# Altium PCB Main Board.PcbDoc
Units mil, origin at the board's own origin, x right, y up, seen from the top; angles counter-clockwise.
Board outline 3554 x 3676 mil, 4 copper layers (Top Layer, Master Layer, Slave Layer, Bottom Layer), stack 23.756 mil thick; 52 components, 46 nets, 312 pads, 87 vias.
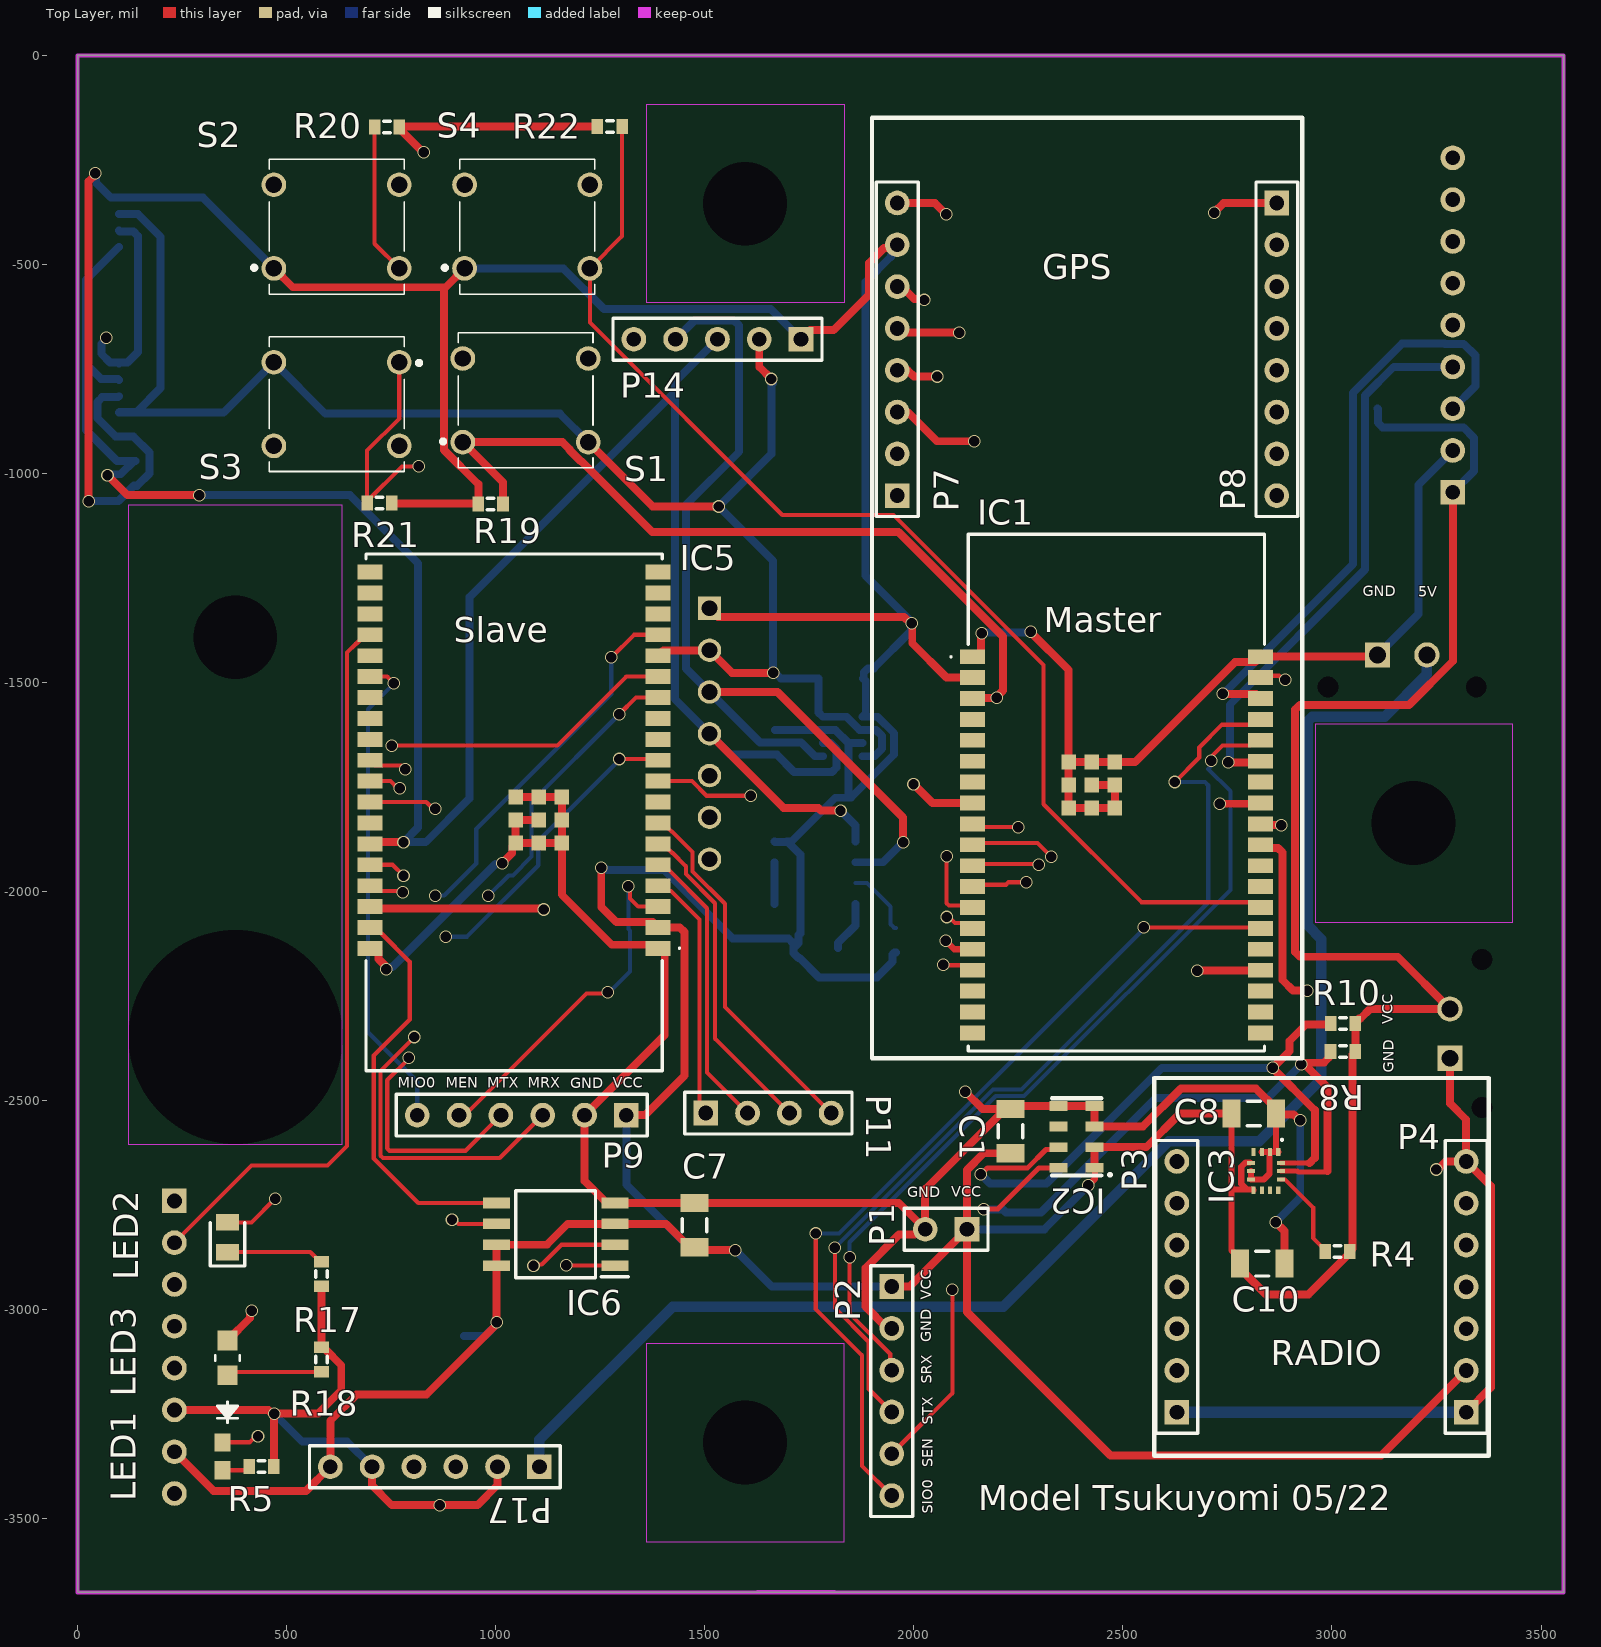
[diagram p0: Top Layer view]
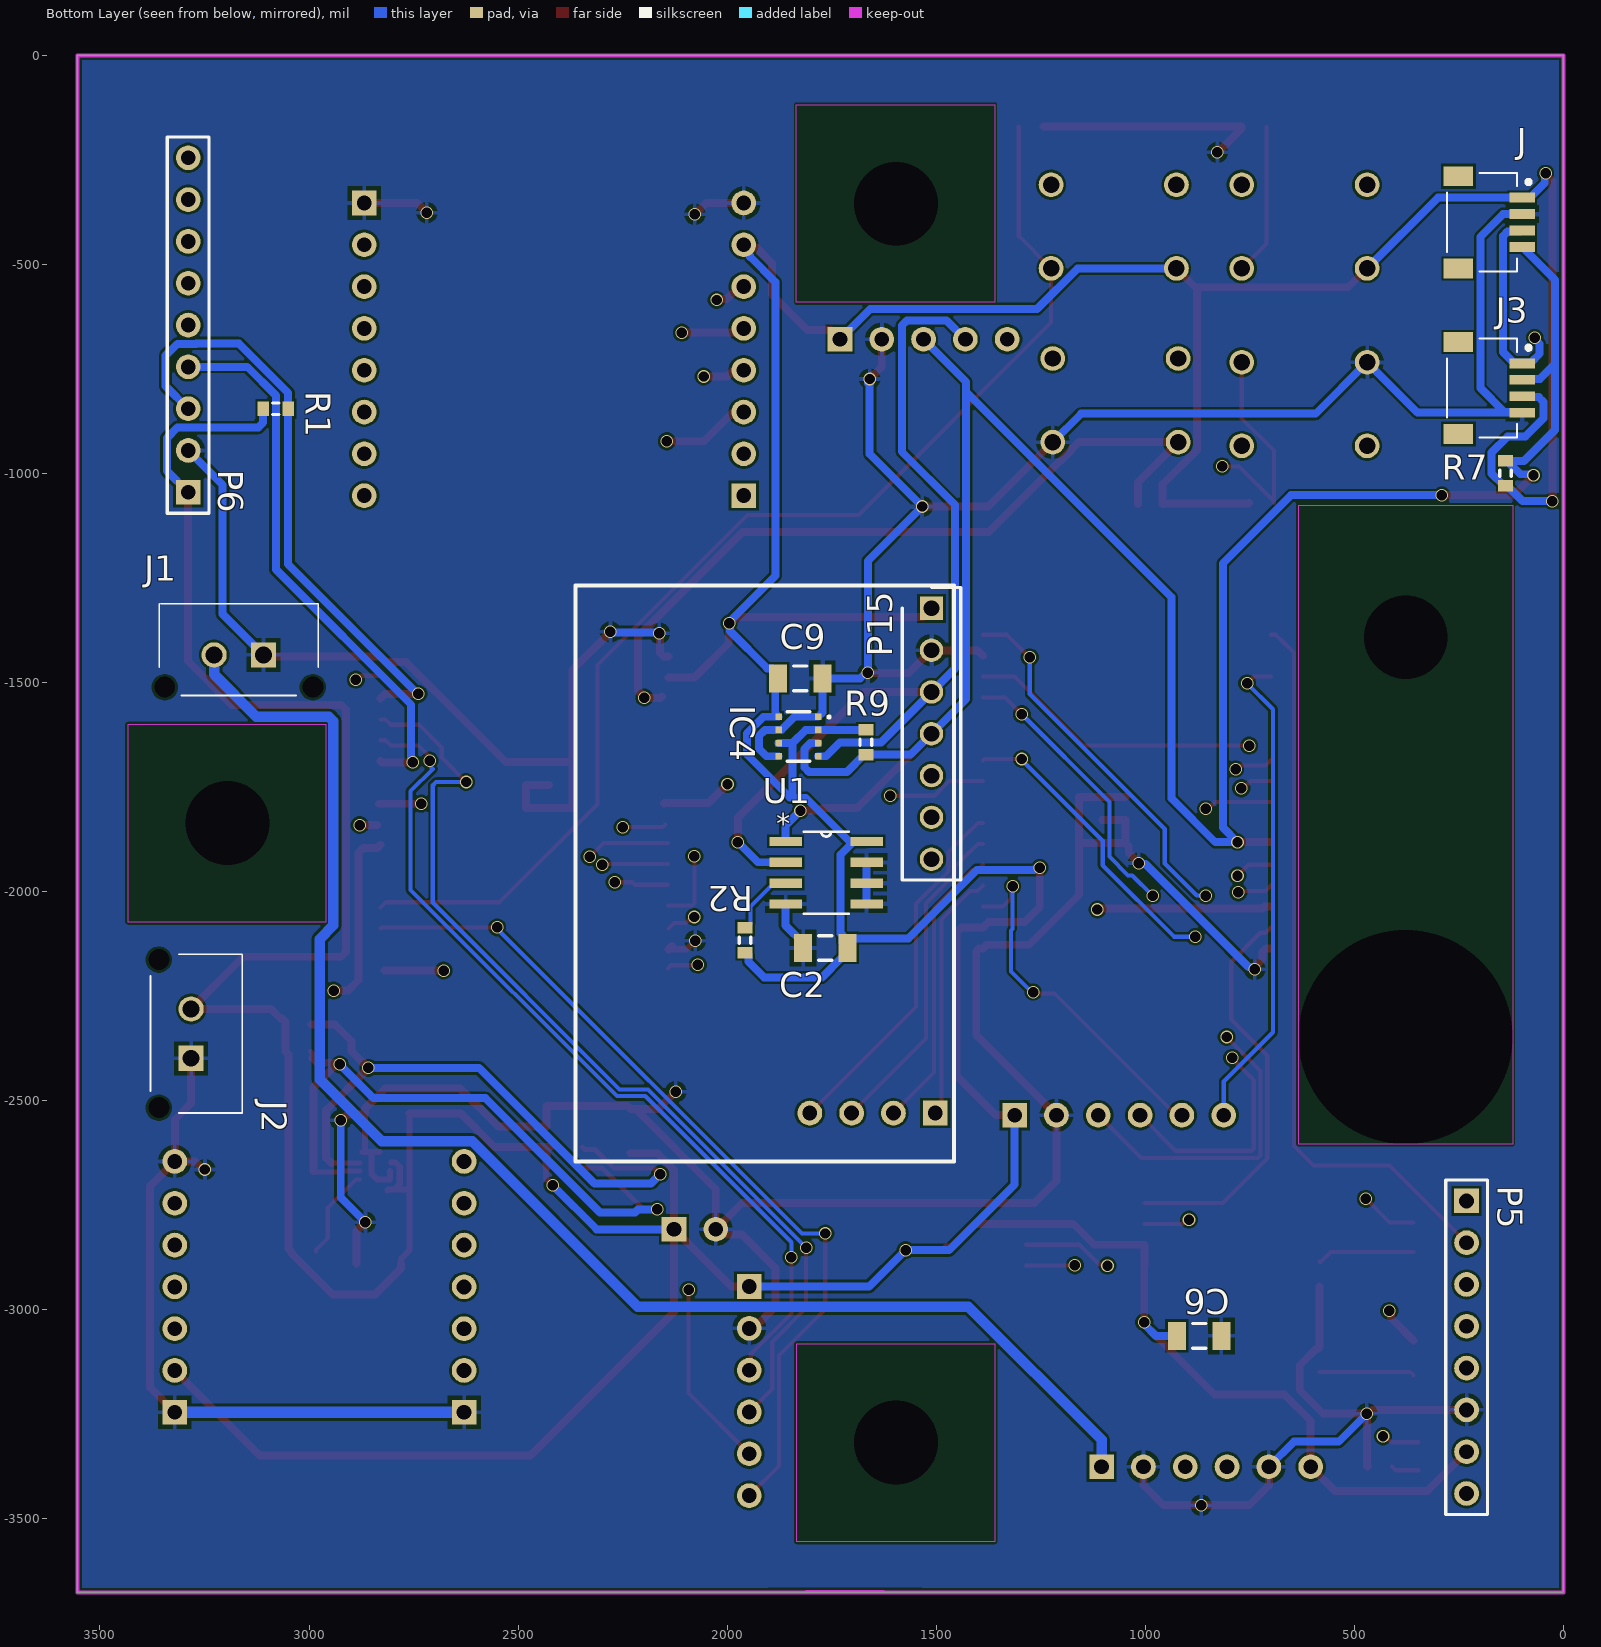
[diagram p1: Bottom Layer view, seen from below]
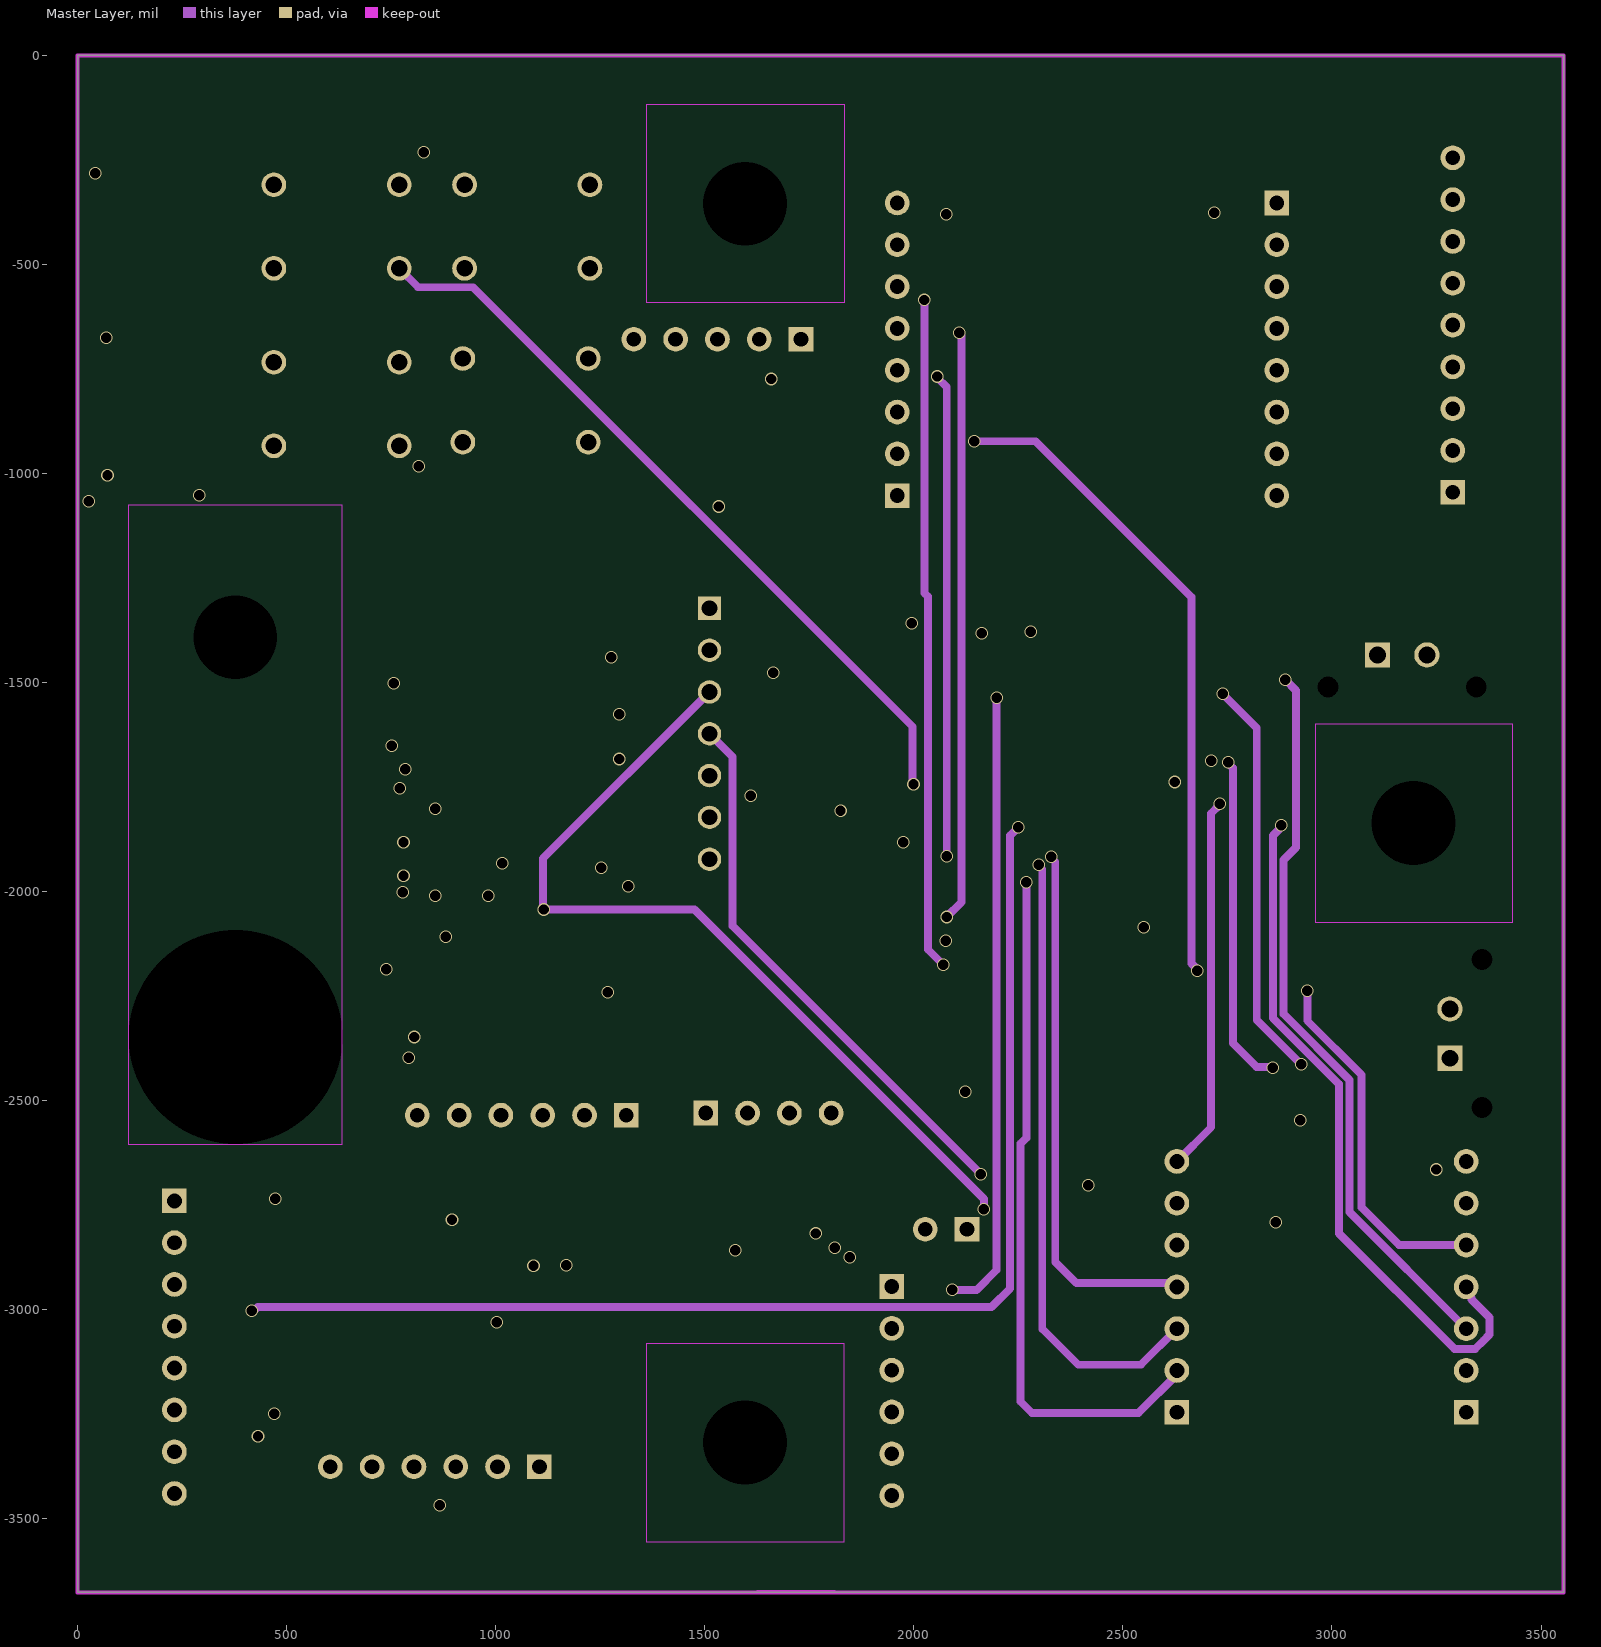
[diagram p2: Master Layer]
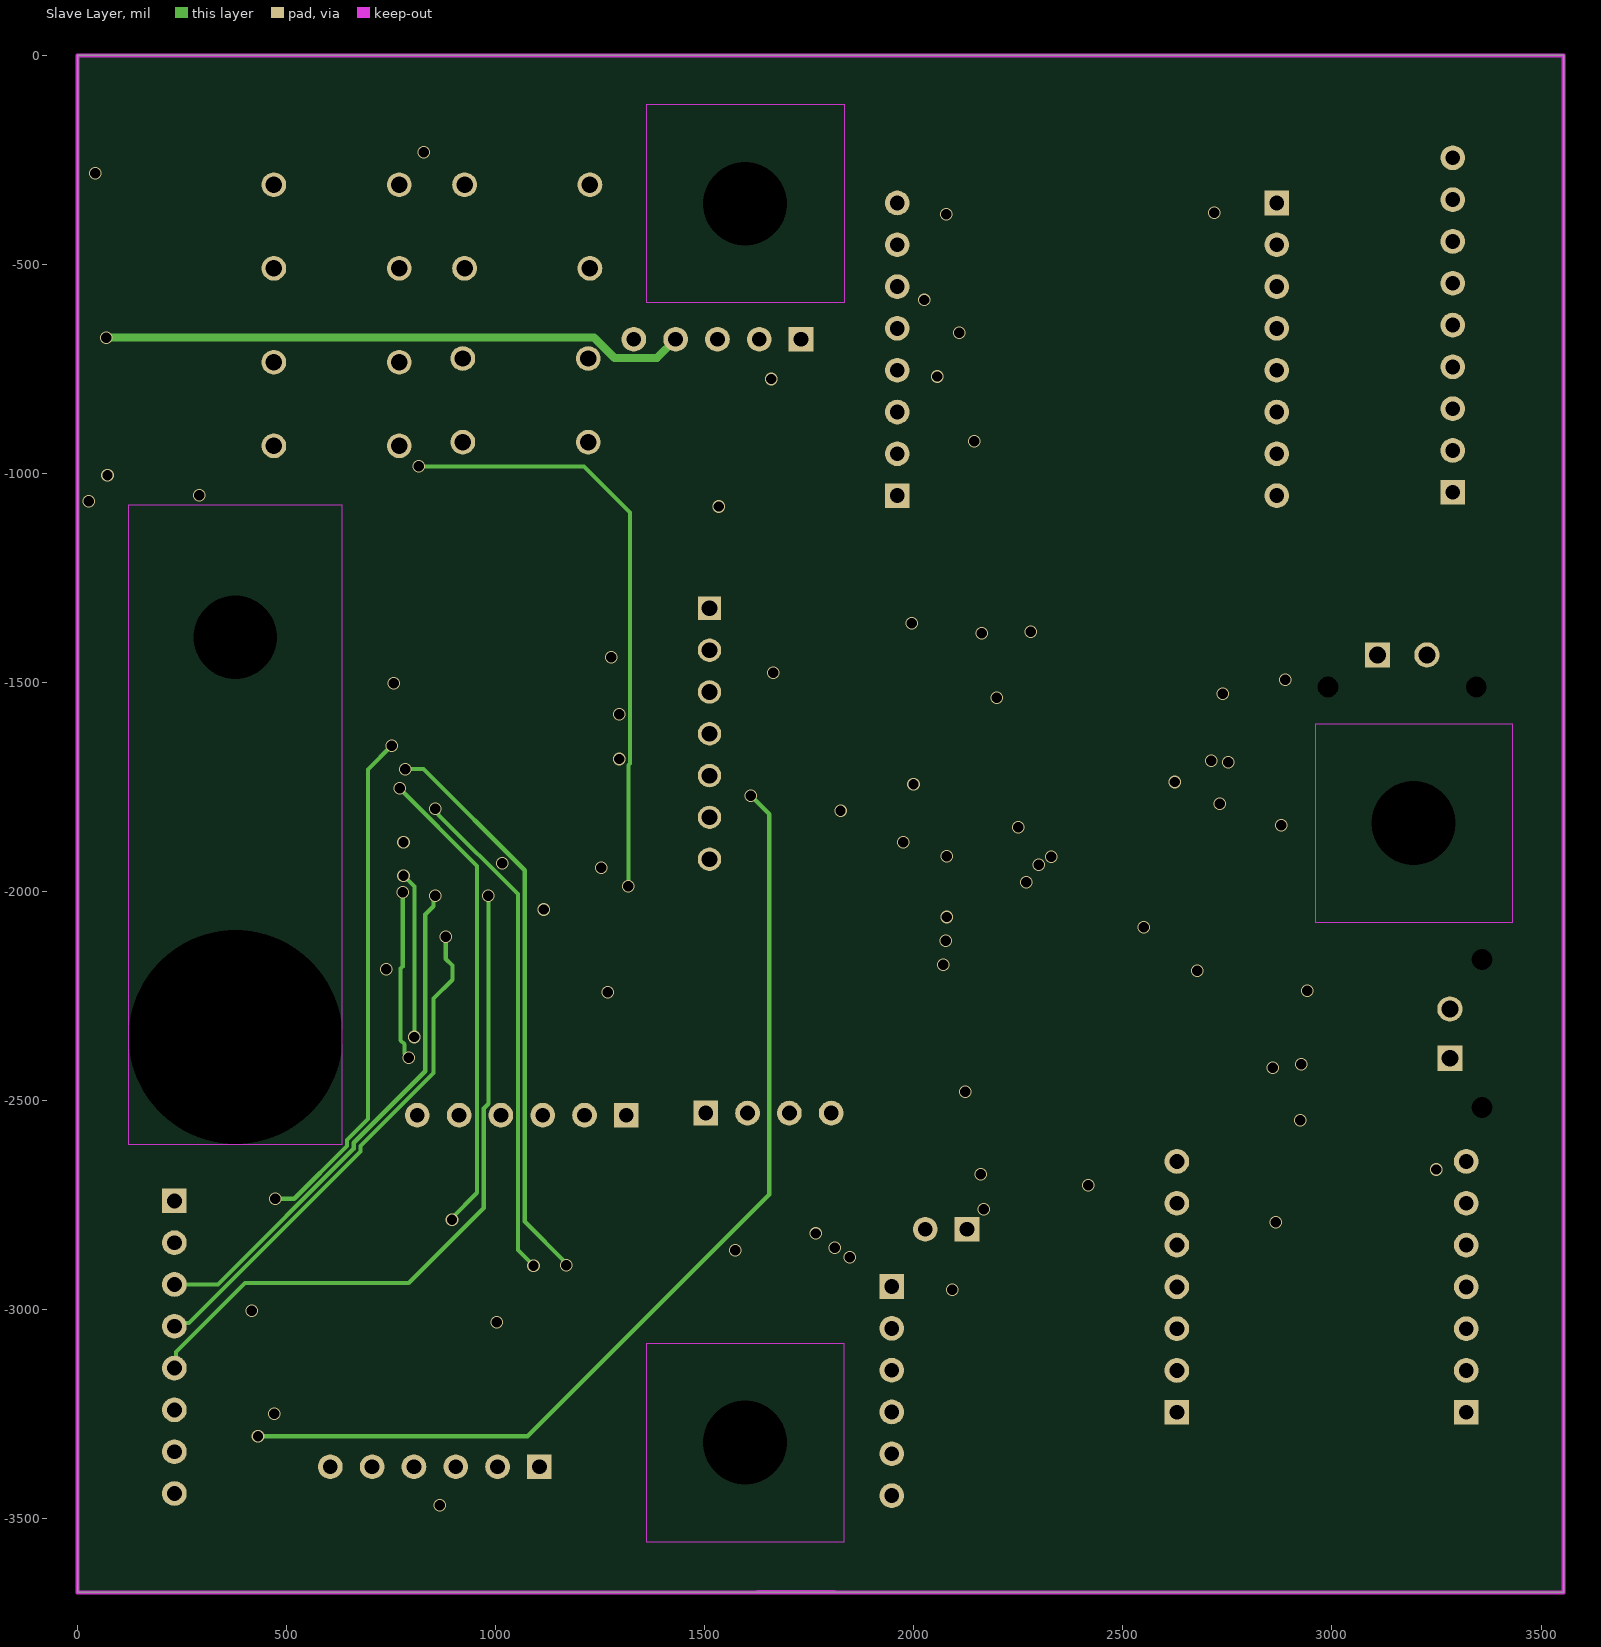
[diagram p3: Slave Layer]

## Layer stack, top to bottom
Top Solder: solder mask 0.4, Solder Resist, Dk 3.5
Top Layer: signal copper 1.4
Dielectric 2: prepreg 2.8, PP-006, Dk 4.1
Master Layer: signal copper 1.378
Dielectric 1: dielectric 12.6, FR-4, Dk 4.8
Slave Layer: signal copper 1.378
Dielectric 3: prepreg 2.8, PP-006, Dk 4.1
Bottom Layer: signal copper 1.4
Bottom Solder: solder mask 0.4, Solder Resist, Dk 3.5

## Board outline
0,0 3554,0 3554,-3676 0,-3676

## Design rules (kind name [scope] priority, off if disabled: settings)
Clearance [All] p1: gap=6 ignorepadtopadclearanceinfootprint=TRUE
DiffPairsRouting [All] p1: maxlimit=25 minlimit=10 mostfreqgap=25 toplayer_minwidth=15 toplayer_maxwidth=15 toplayer_prefwidth=15 midlayer1_minwidth=15 midlayer1_maxwidth=15 midlayer1_prefwidth=15 midlayer2_minwidth=15 midlayer2_maxwidth=15 midlayer2_prefwidth=15 bottomlayer_minwidth=15 bottomlayer_maxwidth=15 bottomlayer_prefwidth=15 maxuncoupledlength=500
HoleSize [All] p1: absolutevalues=TRUE maxlimit=520 minlimit=1 maxpercent=80.000 minpercent=20.000
MinimumSolderMaskSliver [All] p1: minsoldermaskwidth=1
PolygonConnect [All] p1: connectstyle=Relief reliefconductorwidth=10 reliefentries=4 polygonreliefangle="90 Angle" airgapwidth=10
RoutingTopology RoutingTopology_1 [All] p1: topology=Shortest
RoutingTopology [All] p2: topology=Shortest
RoutingVias [All] p1: holewidth=16 width=30 viastyle="Through Hole" minholewidth=25 minwidth=25 maxholewidth=110 maxwidth=250
SilkToSilkClearance [All] p1: silktosilkclearance=5
SilkToSolderMaskClearance [IsText] p1: minsilkscreentomaskgap=5 clearancetoexposedcopper=TRUE
SolderMaskExpansion [All] p1: expansion=4 istentingtop=FALSE
UnRoutedNet [All] p1: checkbadconnections=TRUE
Width [All] p1: maxlimit=28 minlimit=10 preferedwidth=10 toplayer_prefwidth=15 minimp=50.000000 maximp=50.000000 favimp=50.000000
23 further rules are at their usual default settings.

## Components (designator, comment, footprint, x,y, rotation, side; value= is the part's Value field where it differs from the comment)
C1 "Cap Semi" C1206 2231,-2573 r270 top value=100nF
C2 "Cap Semi" C1206 1764.85,-2135 r180 bottom value=0.01uF
C6 "Cap Semi" C1206 870.85,-3063 r0 bottom value=100nF
C7 "Cap Semi" C1206 1475,-2797.85 r270 top value=100nF
C8 "Cap Semi" C1206 2812.85,-2531 r180 top value=100nF
C9 "Cap Semi" C1206 1825,-1490 r0 bottom value=100nF
C10 "Cap Semi" C1206 2833,-2890 r180 top value=100nF
IC1 "ESP32-WROVER-E-N16R8" ESP32WROVEREN16R8 2484.39,-1763.4 r0 top
IC2 "MS561101BA03-50" MS561101BA03-50 2389,-2587 r180 top
IC3 "ISM330DHCXTR" LGA-14(2.5X3X0.86) 2842,-2669 r270 top
IC4 "BME680" BME680 1829.24,-1629.24 r0 bottom
IC5 "ESP32-WROVER-E-N16R8" ESP32WROVEREN16R8 1043.49,-1810.8 r180 top
IC6 "W25Q128JVSIM_TR" SOIC127P790X216-8N 1143,-2820 r180 top
J "SM04B-SRSS-TB(LF)(SN)" JST_SM04B-SRSS-TB(LF)(SN) 98,-399.24 r270 bottom
J1 "0436500217" 0436500217 3108.89,-1434 r180 bottom
J2 "0436500217" 0436500217 3282,-2399 r270 bottom
J3 "SM04B-SRSS-TB(LF)(SN)" JST_SM04B-SRSS-TB(LF)(SN) 98,-795.62 r270 bottom
LED1 "LTST-C193TBKT-5A" 0603 346,-3351 r90 top
LED2 "LTST-C170EKT" LEDC2012X120N 358,-2827 r90 top
LED3 "LTST-C170GKT" LED_LTST-C170GKT_LTO 358,-3115.5 r90 top
P1 "Header 2" HDR1X2 2127,-2808 r180 top
P2 "Header 6" HDR1X6 1947,-2945 r270 top
P3 "Header 7" HDR1X7 2629,-3245.7 r90 top
P4 "Header 7" HDR1X7 3321,-3245.7 r90 top
P5 "Header 8" HDR1X8 231,-2740 r270 bottom
P6 "Header 9" HDR1X9 3289,-1045 r90 bottom
P7 "Header 8" HDR1X8 1960,-1053 r90 top
P8 "Header 8" HDR1X8 2868,-353 r270 top
P9 "Header 6" HDR1X6 1312,-2535 r180 top
P11 "Header 4" HDR1X4 1502,-2530 r0 top
P14 "Header 5" HDR1X5 1730,-679 r180 top
P15 "Header 7" RHDR7W76P0X254_1X7_1778X356X864P 1511,-1322.67 r270 bottom
P17 "Header 6" HDR1X6 1104,-3376 r180 top
R1 "Res3" J1-0603 3079.53,-845 r0 bottom value=10K
R2 "Res3" J1-0603 1957,-2116.47 r90 bottom value=10K
R4 "Res3" J1-0603 3013,-2861 r180 top value=10K
R5 "Res3" J1-0603 439,-3375.46 r0 top value="30 Ohm"
R7 "Res3" J1-0603 138,-999.53 r270 bottom value=10K
R8 "Res3" J1-0603 3026,-2383 r0 top value=10K
R9 "Res3" J1-0603 1668,-1643 r270 bottom value=4.7K
R10 "Res3" J1-0603 3026.47,-2316 r0 top value=10K
R17 "Res3" J1-0603 583,-2914.96 r270 top value="30 Ohm"
R18 "Res3" J1-0603 583,-3119.47 r90 top value="30 Ohm"
R19 "Res3" J1-0603 987.47,-1073 r0 top value=10K
R20 "Res3" J1-0603 739.47,-171 r180 top value=10K
R21 "Res3" J1-0603 721.47,-1070.39 r180 top value=10K
R22 "Res3" J1-0603 1272.53,-170 r0 top value=10K
S1 "KSA0M411LFTR" KSA0M411LFTR 921,-923.43 r0 top
S2 "KSA0M411LFTR" KSA0M411LFTR 469,-507.9 r0 top
S3 "KSA0M411LFTR" KSA0M411LFTR 769,-735.57 r180 top
S4 "KSA0M411LFTR" KSA0M411LFTR 925,-507.9 r0 top
U1 "TMP175AIDR" D8 1763,-1955 r180 bottom

## Footprints (in the part's own frame and the unit in brackets; to place one, negate y for a bottom-side part, rotate by r counter-clockwise, add the part's x,y. Pads: shape width x height; smd on the part's side, far side on the other; paste and mask are expansions set on the pad)
0603 [mm]
  rect 1.1x1 smd: 1(-0.85,0) 2(0.85,0)
0436500217 [mm]
  rect 1.53x1.53 hole 1.02: 1(0,0)
  round 1.53 hole 1.02: 2(-3,0)
  round 0.635 hole 1.27 unplated: MH1(3,-1.96) MH2(-6,-1.96)
  silkscreen extent -6.32,-2.47 3.32,3.1, body extent -6.53,-2.49 3.53,3.1, height 10
BME680 [mm]
  rect 0.4x0.4 smd: 1(-1.2,-1.2) 2(-1.2,-0.4) 3(-1.2,0.4) 4(-1.2,1.2) 5(1.2,1.2) 6(1.2,0.4) 7(1.2,-0.4) 8(1.2,-1.2)
  silkscreen extent -1.89,-1.5 0.7,1.5
C1206 [mm] "Chip Capacitor, Body 3.2x1.6mm, IPC High Density"
  rect 1.1x1.7 smd: 1(-1.35,0) 2(1.35,0)
  silkscreen extent -0.4,-0.75 0.4,0.75, body extent -1.7,-0.9 1.7,0.9, height 1.3
D8 [mil]
  rect 78x22 smd: 1(-97,75) 2(-97,25) 3(-97,-25) 4(-97,-75) 5(97,-75) 6(97,-25) 7(97,25) 8(97,75)
  silkscreen extent -54,-98 54,98, body extent -122,-99 122,99, height 69
ESP32WROVEREN16R8 [mm]
  rect 1.5x0.9 smd: 1(-8.75,8.26) 2(-8.75,6.99) 3(-8.75,5.72) 4(-8.75,4.45) 5(-8.75,3.18) 6(-8.75,1.91) 7(-8.75,0.64) 8(-8.75,-0.63) 9(-8.75,-1.9) 10(-8.75,-3.17) 11(-8.75,-4.44) 12(-8.75,-5.71) 13(-8.75,-6.98) 14(-8.75,-8.25) 15(-8.75,-9.52) 16(-8.75,-10.79) 17(-8.75,-12.06) 18(-8.75,-13.33) 19(-8.75,-14.6) 20(8.75,-14.6) 21(8.75,-13.33) 22(8.75,-12.06) 23(8.75,-10.79) 24(8.75,-9.52) 25(8.75,-8.25) 26(8.75,-6.98) 27(8.75,-5.71) 28(8.75,-4.44) 29(8.75,-3.17) 30(8.75,-1.9) 31(8.75,-0.63) 32(8.75,0.64) 33(8.75,1.91) 34(8.75,3.18) 35(8.75,4.45) 36(8.75,5.72) 37(8.75,6.99) 38(8.75,8.26)
  rect 0.9x0.9 smd: 39(-1.5,0.46) 40(-2.9,-0.94) 41(-1.5,-0.94) 42(-0.1,-0.94) 43(-0.1,0.46) 44(-0.1,1.86) 45(-1.5,1.86) 46(-2.9,1.86) 47(-2.9,0.46)
  silkscreen extent -10.1,-15.7 9,15.7, body extent -9,-15.7 9,15.7, height 3.55
HDR1X2 [mm] "Connector; Header; 2 Position"
  rect 1.5x1.5 hole 0.9: 1(0,0)
  round 1.5 hole 0.9: 2(2.54,0)
  silkscreen extent -1.27,-1.27 3.81,1.27
HDR1X4 [mm] "Connector; Header; 4 Position"
  rect 1.5x1.5 hole 0.9: 1(0,0)
  round 1.5 hole 0.9: 2(2.54,0) 3(5.08,0) 4(7.62,0)
  silkscreen extent -1.27,-1.27 8.89,1.27
HDR1X5 [mm] "Connector; Header; 5 Position"
  rect 1.5x1.5 hole 0.9: 1(0,0)
  round 1.5 hole 0.9: 2(2.54,0) 3(5.08,0) 4(7.62,0) 5(10.16,0)
  silkscreen extent -1.27,-1.27 11.43,1.27
HDR1X6 [mm] "Connector; Header; 6 Position"
  rect 1.5x1.5 hole 0.9: 1(0,0)
  round 1.5 hole 0.9: 2(2.54,0) 3(5.08,0) 4(7.62,0) 5(10.16,0) 6(12.7,0)
  silkscreen extent -1.27,-1.27 13.97,1.27
HDR1X7 [mm] "Connector; Header; 7 Position"
  rect 1.5x1.5 hole 0.9: 1(0,0)
  round 1.5 hole 0.9: 2(2.54,0) 3(5.08,0) 4(7.62,0) 5(10.16,0) 6(12.7,0) 7(15.24,0)
  silkscreen extent -1.27,-1.27 16.51,1.27
HDR1X8 [mm] "Connector; Header; 8 Position"
  rect 1.5x1.5 hole 0.9: 1(0,0)
  round 1.5 hole 0.9: 2(2.54,0) 3(5.08,0) 4(7.62,0) 5(10.16,0) 6(12.7,0) 7(15.24,0) 8(17.78,0)
  silkscreen extent -1.27,-1.27 19.05,1.27
HDR1X9 [mm] "Connector; Header; 9 Position"
  rect 1.5x1.5 hole 0.9: 1(0,0)
  round 1.5 hole 0.9: 2(2.54,0) 3(5.08,0) 4(7.62,0) 5(10.16,0) 6(12.7,0) 7(15.24,0) 8(17.78,0) 9(20.32,0)
  silkscreen extent -1.27,-1.27 21.59,1.27
J1-0603 [mm] "Chip Resistor, Body 1.6x0.8mm, IPC High Density"
  rect 0.7x0.9 smd: 1(-0.75,0) 2(0.75,0)
  silkscreen extent -0.2,-0.35 0.2,0.35, body extent -0.85,-0.48 0.85,0.48, height 0.9
JST_SM04B-SRSS-TB(LF)(SN) [mm]
  rect 0.6x1.55 smd: 1(-1.5,0) 2(-0.5,0) 3(0.5,0) 4(1.5,0)
  rect 1.2x1.8 smd: S1(-2.8,-3.875) S2(2.8,-3.875)
  silkscreen extent -3,-4.57 3,0.48
KSA0M411LFTR [mm]
  round 1.5 hole 1: 1(0,-0.04) 2(7.62,-0.04) 3(0,5.04) 4(7.62,5.04)
  silkscreen extent -1.3,-1.6 7.91,6.6, body extent -0.4,-1.6 8.02,6.6, height 5
LED_LTST-C170GKT_LTO [mil]
  rect 47x47 smd paste+0 mask+0: 1(-41.5,0) 2(41.5,0)
  silkscreen extent -155,-30 6,30, body extent -39,-25 39,25, height 43
LEDC2012X120N [mm]
  rect 1x1.4 smd: 1(-0.9,0) 2(0.9,0)
  silkscreen extent -1.75,-1.05 0.9,1.05
LGA-14(2.5X3X0.86) [mm]
  rect 0.475x0.25 smd: 1(-1.162,0.75) 2(-1.162,0.25) 3(-1.162,-0.25) 4(-1.162,-0.75) 8(1.162,-0.75) 9(1.162,-0.25) 10(1.162,0.25) 11(1.162,0.75)
  rect 0.25x0.475 smd: 5(-0.5,-0.913) 6(0,-0.913) 7(0.5,-0.913) 12(0.5,0.913) 13(0,0.913) 14(-0.5,0.913)
  silkscreen extent -1.93,0.95 -1.88,1.01, body extent -1.5,0 1.5,0.86, height 1.25
MS561101BA03-50 [mm]
  rect 1.1x0.6 smd: 1(-1.1,1.875) 2(-1.1,0.625) 3(-1.1,-0.625) 4(-1.1,-1.875) 5(1.1,-1.875) 6(1.1,-0.625) 7(1.1,0.625) 8(1.1,1.875)
  silkscreen extent -2.08,-2.35 1.5,2.35, body extent -1.5,-2.5 1.5,2.5, height 0.95
RHDR7W76P0X254_1X7_1778X356X864P [mm]
  rect 1.425x1.425 hole 0.95: 1(0,0)
  round 1.425 hole 0.95: 2(2.54,0) 3(5.08,0) 4(7.62,0) 5(10.16,0) 6(12.7,0) 7(15.24,0)
  silkscreen extent -1.27,-1.78 16.51,1.78, body extent -1.27,-1.78 16.51,1.78, height 8.64
SOIC127P790X216-8N [mm]
  rect 1.65x0.65 smd: 1(-3.6,1.905) 2(-3.6,0.635) 3(-3.6,-0.635) 4(-3.6,-1.905) 5(3.6,-1.905) 6(3.6,-0.635) 7(3.6,0.635) 8(3.6,1.905)
  silkscreen extent -4.43,-2.64 2.42,2.64, body extent -3.95,-2.64 3.95,2.64, height 2.16

## Part data
C1 C2 C6 C7 C8 C9 C10: "Capacitor (Semiconductor SIM Model)", LatestRevisionDate=29-May-2009, LatestRevisionNote="IPC-7351 Footprint Added.", PackageDescription="Chip Capacitor", PackageReference=C1206, Published=8-Jun-2000, Publisher="Altium Limited"
IC1 IC5: "Integrated Circuit", Manufacturer_Name="Espressif Systems", Mouser Part Number=356-ESP32WRVE22864PC, Datasheet Link=https://www.espressif.com/sites/default/files/documentation/esp32-wrover-e_esp32-wrover-ie_datasheet_en.pdf, Height=3.45mm, Manufacturer_Part_Number=ESP32-WROVER-E-N16R8, Mouser Price/Stock=https://www.mouser.co.uk/ProductDetail/Espressif-Systems/ESP32-WROVER-E-N16R8?qs=Li%252BoUPsLEnsfUZ%252By2eNF6g%3D%3D
IC2: "Integrated Circuit", Manufacturer_Name="TE Connectivity", Mouser Part Number=824-MS561101BA03-50, Arrow Part Number=MS561101BA03-50, Arrow Price/Stock=https://www.arrow.com/en/products/ms561101ba03-50/te-connectivity?region=europe, Datasheet Link=http://www.te.com/usa-en/search.html?q=ms5611&source=header, Manufacturer_Part_Number=MS561101BA03-50, Mouser Price/Stock=https://www.mouser.co.uk/ProductDetail/Measurement-Specialties/MS561101BA03-50?qs=%252BgKeJhng5iV%252BnCz6Qd5iDw%3D%3D
IC3: "Integrated Circuit", Manufacturer_Name=STMicroelectronics, Mouser Part Number=511-ISM330DHCXTR, Arrow Part Number=ISM330DHCXTR, Arrow Price/Stock=https://www.arrow.com/en/products/ism330dhcxtr/stmicroelectronics?region=nac, Datasheet Link=https://www.st.com/resource/en/datasheet/ism330dhcx.pdf, Manufacturer_Part_Number=ISM330DHCXTR, Mouser Price/Stock=https://www.mouser.co.uk/ProductDetail/STMicroelectronics/ISM330DHCXTR?qs=%252B6g0mu59x7Jv2Xps2dM6Xw%3D%3D
IC4: "Integrated Circuit", Manufacturer_Name="Bosch Sensortec", Mouser Part Number=262-BME680, Arrow Part Number=BME680, Arrow Price/Stock=https://www.arrow.com/en/products/bme680/bosch?region=nac, Datasheet Link=https://datasheet.datasheetarchive.com/originals/distributors/DKDS-24/462907.pdf, Manufacturer_Part_Number=BME680, Mouser Price/Stock=https://www.mouser.co.uk/ProductDetail/Bosch-Sensortec/BME680?qs=v271MhAjFHjo0yA%2FC4OnDQ%3D%3D
IC6: "Integrated Circuit", Arrow Part Number="W25Q128JVSIM TR", Manufacturer_Name=Winbond, Mouser Part Number=454-W25Q128JVSIMTR, Arrow Price/Stock=https://www.arrow.com/en/products/w25q128jvsimtr/winbond-electronics?region=nac, Datasheet Link=http://www.winbond.com/resource-files/w25q128jv%20dtr%20revb%2011042016.pdf, Height=2.16mm, Manufacturer_Part_Number="W25Q128JVSIM TR", Mouser Price/Stock=https://www.mouser.co.uk/ProductDetail/Winbond/W25Q128JVSIM-TR?qs=qSfuJ%252Bfl%2Fd6ji9IuruL6Zg%3D%3D
J J3: "Connector Header Surface Mount, Right Angle 4 position 0.039 _1.00mm_", Package=None, Availability=Unavailable, MF="JST Sales", MP=SM04B-SRSS-TB_LF__SN_, Price=None, SnapEDA_Link=https://www.snapeda.com/parts/SM04B-SRSS-TB%28LF%29%28SN%29/JST%20Sales%20America%20Inc./view-part/557466/?ref=snap
J1 J2: "Connector", Manufacturer_Name=Molex, Mouser Part Number=N/A, Arrow Part Number=0436500217, Arrow Price/Stock=https://www.arrow.com/en/products/0436500217/molex, Datasheet Link=https://datasheet.datasheetarchive.com/originals/distributors/Datasheets-DGA21/2145585.pdf, Height=9.9mm, Manufacturer_Part_Number=0436500217, Mouser Price/Stock=https://www.mouser.co.uk/ProductDetail/Molex/0436500217?qs=%252BdQmOuGyFcG%2F6znKEq1cuQ%3D%3D
LED1: "Blue 470nm LED Indication - Discrete 2.8V 0603 _1608 Metric_", Package="0603 Lite-On", Digi-Key_Part_Number=160-1827-1-ND, Digi-Key_Purchase_URL=https://www.digikey.com/product-detail/en/lite-on-inc/LTST-C193TBKT-5A/160-1827-1-ND/2355044?utm_source=snapeda&utm_medium=aggregator&utm_campaign=symbol, MF="Lite-On Inc.", MP=LTST-C193TBKT-5A, SnapEDA_Link=https://www.snapeda.com/parts/LTST-C193TBKT-5A/Lite-On%20Inc./view-part/350303/?ref=snap
LED2: "LED", Manufacturer_Name=Lite-On, Mouser Part Number=859-LTST-C170EKT, Arrow Part Number=LTST-C170EKT, Arrow Price/Stock=https://www.arrow.com/en/products/ltst-c170ekt/lite-on-technology, Datasheet Link=https://media.digikey.com/pdf/Data%20Sheets/Lite-On%20PDFs/LTST-C170EKT.pdf, Height=1.2mm, Manufacturer_Part_Number=LTST-C170EKT, Mouser Price/Stock=https://www.mouser.co.uk/ProductDetail/Lite-On/LTST-C170EKT?qs=0hBTvMLoVZ04yIRvO1DUlw%3D%3D
LED3: "No Description Available", Mfr_Name=LITE-ON, Copyright="Copyright (C) 2022 Ultra Librarian. All rights reserved.", Digi-Key_Part_Number_1=160-1179-2-ND, Digi-Key_Part_Number_2=160-1179-1-ND, Digi-Key_Part_Number_3=160-1179-6-ND, Manufacturer_Part_Number=LTST-C170GKT, RefDes=RefDes, Type=DEV
P1: "Header, 2-Pin", LatestRevisionDate=17-Jul-2002, LatestRevisionNote="Re-released for DXP Platform.", Publisher="Altium Limited"
P2 P9 P17: "Header, 6-Pin", LatestRevisionDate=17-Jul-2002, LatestRevisionNote="Re-released for DXP Platform.", Publisher="Altium Limited"
P3 P4 P15: "Header, 7-Pin", LatestRevisionDate=17-Jul-2002, LatestRevisionNote="Re-released for DXP Platform.", Publisher="Altium Limited"
P5 P7 P8: "Header, 8-Pin", LatestRevisionDate=17-Jul-2002, LatestRevisionNote="Re-released for DXP Platform.", Publisher="Altium Limited"
P6: "Header, 9-Pin", LatestRevisionDate=17-Jul-2002, LatestRevisionNote="Re-released for DXP Platform.", Publisher="Altium Limited"
P11: "Header, 4-Pin", LatestRevisionDate=17-Jul-2002, LatestRevisionNote="Re-released for DXP Platform.", Publisher="Altium Limited"
P14: "Header, 5-Pin", LatestRevisionDate=17-Jul-2002, LatestRevisionNote="Re-released for DXP Platform.", Publisher="Altium Limited"
R1 R2 R4 R5 R7 R8 R9 R10 R17 R18 R19 R20 R21 R22: "Resistor", LatestRevisionDate=29-May-2009, LatestRevisionNote="IPC-7351 Footprint Added.", PackageDescription="Chip Resistor", PackageReference=J1-0603, Published=8-Jun-2000, Publisher="Altium Limited"
S1 S2 S3 S4: "Switch", Manufacturer_Name="C & K COMPONENTS", Datasheet Link=https://www.ckswitches.com/media/1457/ksa_ksl.pdf, Height=4.9mm, Manufacturer_Part_Number=KSA0M411LFTR
U1: "No Description Available", Mfr_Name="Texas Instruments", Copyright="Copyright (C) 2022 Ultra Librarian. All rights reserved.", Digi-Key_Part_Number_1=296-17837-1-ND, Digi-Key_Part_Number_2=296-17837-2-ND, Digi-Key_Part_Number_3=296-17837-6-ND, Digi-Key_Part_Number_4=2156-TMP175AIDR-ND, Manufacturer_Part_Number=TMP175AIDR, RefDes=RefDes, Type=DEV

## Free pads (board coordinates)
  round 60 hole 512: 3(377,-2348)
  round 60 hole 200: 4(377,-1392) 5(3195,-1836) 7(1596,-355) 8(1596,-3318)

## Via types
v1: diameter 30, hole 25, Top Layer to Bottom Layer, tented both sides, 47 vias
v2: diameter 30, hole 25, Top Layer to Bottom Layer, 40 vias

## Nets (pads, with @x,y where several pads share a name; then routed paths per layer and width w, separated by ;. In a path a pad name is that pad's centre, name@x,y a point inside that pad or via, vN(x,y) a via of type N, cw(c..) or ccw(c..) an arc to the next point about the centre after c; other vN are vias at no path point)
GND: C1.1 C2.1 C6.1 C7.1 C8.1 C9.1 C10.1 IC1.1 IC1.15 IC1.38 IC1.39 IC1.40 IC1.41 IC1.42 IC1.43 IC1.44 IC1.45 IC1.46 IC1.47 IC2.3 IC2.4 IC2.5 IC3.1 IC3.2 IC3.3 IC3.6 IC3.7 IC4.1 IC4.5 IC4.7 IC5.1 IC5.15 IC5.38 IC5.39 IC5.40 IC5.41 IC5.42 IC5.43 IC5.44 IC5.45 IC5.46 IC5.47 IC6.4 J1.1 J2.1 J3.4 J.2 P1.2 P2.2 P3.1 P4.1 P4.7 P5.6 P6.2 P7.8 P8.1 P9.2 P14.2 P15.2 P17.2 P17.5 R5.2 R17.2 R18.2 R20.1 R22.1 S1.2 S3.2 U1.4 U1.5 U1.6 U1.7 | length 15749.7
  Top Layer w15: v1(2076,-2118) 2096.2,-2138.2 IC1.15 ; IC3.6 IC3.7 2837.32,-2688.68 2850.58,-2675.42 2850.58,-2624.5 IC3.2 ; IC3.3 IC3.2 ; C8.1 2866,-2618.43 IC3.1@2870.8,-2623.23 ; IC3.1 IC3.1@2870.8,-2623.23 ; IC3.2 IC3.1@2870.8,-2623.23
  Top Layer w19: P5.6 455.59,-3240 464.59,-3249 v2(470,-3249) ; R5.2 469.26,-3374.73 469.26,-3249.74 v2(470,-3249) ; R17.2 R18.2 587.28,-3094.22 591.22,-3094.22 630.15,-3133.16 630.15,-3192.85 574,-3249 v2(470,-3249) ; IC5.38 710.81,-2136 719.03,-2144.22 719.03,-2161.62 735.9,-2178.48 735.9,-2183.9 v2(738,-2186) ; P17.5 704,-3421 751,-3468 v2(866,-3468) 956,-3468 1003.47,-3420.53 1003.47,-3376.53 P17.2 ; v2(827,-232) 826.06,-232 769,-174.94 R20.1 769.5,-170.5 1242.5,-170.5 R22.1 ; v2(1015,-1932) 1039.21,-1907.79 1039.21,-1892.25 IC5.44 ; IC5.42 IC5.41 IC5.40 IC5.47 IC5.46 ; IC5.39 IC5.43 IC5.44 ; S1.2 1375,-1079 v2(1533,-1079) ; IC5.1 1379.27,-2127.3 1277.3,-2127.3 1157.66,-2007.66 IC5.46 ; IC5.15 1400.69,-1423.28 P15.2@1510.39,-1423.28 ; IC5.1@1397.28,-2136 1404,-2142.72 1404,-2343 P9.2 1212,-2691.95 1265.05,-2745 IC6.4 1474.7,-2745 C7.1 1963.7,-2744.7 P1.2 ; P15.2 1565.33,-1477 v2(1663,-1477) ; P14.2 1630,-745 v2(1659,-774) ; P2.2 1936.16,-3045 1884,-2992.84 1884,-2901 1964.32,-2820.68 2001.05,-2820.68 2013.73,-2808 P1.2 ; P7.8 2050,-353 v2(2077,-380) ; v2(2123,-2479) 2163.85,-2519.85 C1.1@2219.19,-2519.85 ; IC1.15@2131.69,-2129.99 IC1.15 ; IC1.1 2151.72,-1438.2 2159.93,-1429.99 2159.93,-1384.04 v2(2161.92,-1382.05) ; v2(2279,-1379) 2370.22,-1470.22 IC1.46 ; IC1.39 IC1.43 IC1.42 IC1.41 IC1.40 IC1.47 IC1.46 ; v2(2718,-376) 2741,-353 P8.1 ; v2(2865,-2791) 2865,-2791.13 2886.15,-2812.28 C10.1 ; v2(2924.12,-2547.12) 2922.03,-2547.12 2907.91,-2533 2868,-2533 C8.1 2866,-2519.19 2817.81,-2471 2639,-2471 2547.61,-2562.39 IC2.3 IC2.4 IC2.5 2237.67,-2513.18 C1.1 C1.1@2219.19,-2519.85 ; J1.1 3104.69,-1438.2 IC1.38 2816.16,-1450.92 2768.39,-1450.92 2529.14,-1690.17 IC1.44 IC1.45 IC1.46 ; v2(3249,-2665) 3252.83,-2665 3272.13,-2645.7 P4.7 ; J2.1 3282,-2506.71 3321,-2545.71 P4.7 ; P4.1 3380,-3186.7 3380,-2704.7 P4.7 ; IC5.44 IC5.45 IC5.46 ; P1.2 2027,-2712.04 C1.1@2219.19,-2519.85
  Bottom Layer w10: v2(738,-2186) 741.59,-2182.41 v2@741.83,-2182.17
  Bottom Layer w19: J.2 143.56,-379.56 198,-434 198,-795.49 140.72,-852.77 99.9,-852.77 J3.4 348.33,-854.68 S3.2 592,-857 1153,-857 S1.2 ; v2(470,-3249) 537,-3316 644,-3316 P17.5 ; v2@741.59,-2182.41 743.08,-2183.9 746.48,-2180.5 752.5,-2180.5 998.9,-1934.1 1012.9,-1934.1 v2(1015,-1932) ; v2@1662.83,-784.17 1662.83,-777.83 v2(1659,-774) 1659,-953 v2(1533,-1079) 1663,-1209 v2(1663,-1477) 1668.41,-1477 1681.41,-1490 C9.1 1771.85,-1571.85 IC4.1 1838.82,-1582 1870.32,-1613.5 1909.28,-1613.5 1924,-1628.22 1924,-1658 1905.51,-1676.49 IC4.5 ; U1.5 U1.6 U1.7 ; C2.1 1818,-2123.19 1860,-2081.19 U1.4 ; v2(2161.92,-1382.05) 2163.45,-1380.53 2277.47,-1380.53 v2(2279,-1379) ; v2(2865,-2791) 2924.12,-2731.88 v2(2924.12,-2547.12) ; J1.1 3206.81,-1336.08 3206.81,-1027.19 P6.2
  Bottom Layer w28: P3.1 P4.1
NetIC1_3: IC1.3 P2.5 R19.2 S1.1 | length 3816.2
  Top Layer w10: P2.5 2092,-3200 v1(2092,-2953)
  Top Layer w19: R19.2 1017,-1021 S1.1 1159,-925 1175.97,-941.97 1175.97,-943.65 1202.35,-970.03 1204.03,-970.03 1374,-1140 1963,-1140 2213,-1390 2213,-1519.37 2198,-1534.37 v1(2198,-1536) 2196.9,-1537.1 2159.42,-1537.1 IC1.3@2156.12,-1533.8
  Master Layer w19: v1(2092,-2953) 2150,-2953 2198,-2905 v1(2198,-1536)
NetIC1_8: IC1.8 R20.2 S2.2 | length 2353.9
  Top Layer w10: R20.2 709.94,-450.42 S2.2
  Top Layer w19: v1(1999,-1743) 2044.2,-1788.2 2150.12,-1788.2 IC1.8@2150.92,-1789
  Master Layer w19: S2.2 814.03,-554.51 945.51,-554.51 1996.9,-1605.9 1996.9,-1740.9 v1(1999,-1743)
NetIC1_9: IC1.9 LED3.2 | length 3149.9
  Top Layer w10: IC1.9@2147.71,-1840 2153.71,-1846 v1(2250,-1846)
  Top Layer w19: LED3.2 412.17,-3019.83 412.17,-3006.83 v1(416,-3003) v1@416,-3005
  Master Layer w19: v1(416,-3003) 421.41,-3003 430.41,-2994 2185.76,-2994 2230.3,-2949.46 2230.3,-1865.7 v1(2250,-1846)
NetIC1_10: IC1.10 P3.4 | length 1489.7
  Top Layer w10: IC1.10@2141.51,-1883.8 2295.8,-1883.8 v1(2329,-1917)
  Master Layer w19: v1(2329,-1917) 2329,-1919.98 2338,-1928.98 2338,-2886 2388.36,-2936.36 2619.66,-2936.36 P3.4
NetIC1_11: IC1.11 P3.3 | length 1664.7
  Top Layer w10: IC1.11@2141.51,-1933.8 2296.13,-1933.8 v1(2298.59,-1936.26)
  Master Layer w19: v1(2298.59,-1936.26) 2298.59,-1939.24 2307,-1947.65 2307,-3046 2393,-3132 2542.7,-3132 P3.3
NetIC1_12: IC1.12 P3.2 | length 1810.6
  Top Layer w10: IC1.12@2141.51,-1983.8 2220.3,-1983.8 2226.48,-1977.62 v1(2269,-1977.62)
  Master Layer w19: v1(2269,-1977.62) 2269,-2589.1 2255.3,-2602.8 2255.3,-3220.3 2282,-3247 2537.05,-3247 2629,-3155.05 P3.2
NetIC1_13: IC1.13 P7.4 | length 1437.7
  Top Layer w10: v1(2078.5,-1916) 2077.91,-1916.59 2077.91,-2027.95 2083.77,-2033.8 IC1.13@2141.51,-2033.8
  Top Layer w19: P7.4 1985,-753 2000,-768 v1(2056,-768)
  Master Layer w19: v1(2056,-768) 2056,-770.98 2078.5,-793.48 v1(2078.5,-1916)
NetIC1_14: IC1.14 P7.5 | length 1640.2
  Top Layer w10: v1(2078.09,-2060.98) 2083.5,-2060.98 2098.01,-2075.49 2127.19,-2075.49 IC1.14
  Top Layer w19: P7.5 1970,-663 v1(2108,-663)
  Master Layer w19: v1(2078.09,-2060.98) 2113.53,-2025.55 2113.53,-671.5 2108,-665.98 v1(2108,-663)
NetIC1_16: IC1.16 P7.6 | length 1762.1
  Top Layer w10: v1(2070,-2175) 2071.28,-2176.28 2133.99,-2176.28 IC1.16@2141.51,-2183.8
  Top Layer w19: P7.6 1970.84,-553 2000.73,-582.9 2022.9,-582.9 v1(2025,-585)
  Master Layer w19: v1(2025,-585) 2025,-636.6 2025.5,-637.1 2025.5,-1286.28 2034.03,-1294.8 2034.03,-2139.03 v1(2070,-2175)
NetIC1_23: IC1.23 P7.3 | length 1927.5
  Top Layer w19: P7.3 1985,-853 2055,-923 v1(2144.03,-923) ; v1(2678,-2189) IC1.23@2819.29,-2189
  Master Layer w19: v1(2144.03,-923) 2290.85,-923 2663.85,-1296 2663.85,-2172.37 2678,-2186.52 v1(2678,-2189)
NetIC1_25: IC1.25 P2.6 | length 2072.1
  Top Layer w10: v1(1765,-2818) 1765,-2998.44 1876,-3109.44 1876,-3374 P2.6 ; v1(2550,-2086) 2826.68,-2086 IC1.25
  Bottom Layer w10: v1(1765,-2818) 1821,-2818 2550,-2089 v1(2550,-2086)
NetIC1_26: IC1.26 R22.2 S4.2 | length 2879.5
  Top Layer w10: R22.2 1302.06,-432.42 S4.2 1225,-639 1685,-1099 1950.99,-1099 2310,-1458.01 2310,-1791.18 2544.31,-2025.49 2816.16,-2025.49 IC1.26
NetIC1_29: IC1.29 P4.5 | length 1295.3
  Top Layer w19: IC1.29 2836.44,-1895.76 2870.87,-1895.76 2882,-1906.89 2882,-2212 2907,-2237 v1(2941,-2237)
  Master Layer w19: v1(2941,-2237) 2941,-2309 3071,-2439 3071,-2756 3160.7,-2845.7 P4.5
NetIC1_30: IC1.30 P4.4 | length 1717.7
  Top Layer w19: IC1.30@2837.69,-1841 v1(2879,-1841)
  Master Layer w19: v1(2879,-1841) 2879,-1843.98 2873.5,-1849.48 2873.5,-1851.36 2859,-1865.86 2859,-2302.96 3017,-2460.96 3017,-2818 3293,-3094 3342.75,-3094 3362.37,-3074.38 3376.87,-3059.88 3376.87,-3039.38 3376.87,-3018.87 3362.37,-3004.37 3333.84,-2975.84 3333.84,-2971.81 3321,-2958.98 P4.4
NetIC1_31: IC1.31 P3.7 | length 1001
  Top Layer w10: IC1.31@2832.69,-1790 IC1.31@2833.69,-1789
  Top Layer w19: v1(2731,-1790) IC1.31@2832.69,-1790
  Master Layer w19: P3.7 2711,-2563.7 2711,-1812.98 2731,-1792.98 v1(2731,-1790)
NetIC1_33: IC1.33 IC2.7 IC3.14 IC4.3 IC5.33 J3.2 J.4 P6.4 P14.3 P15.4 R7.1 R9.2 R10.1 U1.1 | length 10709.9
  Top Layer w10: IC5.33 IC5.33@703,-1882
  Top Layer w12: v2(2160,-2676) 2161.03,-2676 2176.03,-2661 2272,-2661 2316.08,-2616.92 2340.38,-2616.92 IC2.7 ; IC3.14 2946.68,-2649.32 ; R10.1@2994.34,-2318.6 R10.1
  Top Layer w19: v2(71,-1004) 119,-1052 v2(290,-1052) ; IC5.33@703,-1882 v2(779,-1882) ; P15.4 1688.33,-1800 1771.4,-1800 1777.79,-1806.4 v1(1824.4,-1806.4) ; v2(2752,-1691) 2826.09,-1691 IC1.33 ; 2946.68,-2649.32 2959,-2637 2959,-2523 v2(2858,-2422) 2898.75,-2381.25 2898.75,-2357.25 2937.4,-2318.6 R10.1@2994.34,-2318.6
  Master Layer w19: P15.4 1566,-1677.67 1566,-2082 v2(2160,-2676) ; v2(2752,-1691) 2752,-1693.98 2763,-1704.98 2763,-2363 2819.9,-2419.9 2855.9,-2419.9 v2(2858,-2422)
  Bottom Layer w10: R9.2 R9.2@1671.94,-1672.53
  Bottom Layer w19: v2(71,-1004) 73.1,-1001.9 102.17,-1001.9 R7.1@134.06,-970 ; J3.2 95.78,-773.71 55.59,-773.71 19.5,-737.62 ; J.4 19.5,-536.8 19.5,-737.62 ; R7.1 R7.1@134.06,-970 ; v2(290,-1052) 651,-1052 814,-1215 814,-1847 v2(779,-1882) 832,-1882 937,-1777 937,-1296 1428,-805 ; P14.3 1428,-781 1428,-805 ; R9.2 1560.86,-1672.53 P15.4 1428,-1539.67 1428,-805 ; R9.2@1671.94,-1672.53 1713.41,-1714 1804,-1714 1815.13,-1702.87 1815.13,-1659.13 1800.99,-1644.99 IC4.3 ; v1(1824.4,-1806.4) 1860,-1842 U1.1 ; v2(2160,-2676) 2182.17,-2698.17 2316.83,-2698.17 2593,-2422 v2(2858,-2422) ; v2(2752,-1691) 2754.1,-1688.9 2754.1,-1681.12 2755.67,-1679.55 2755.67,-1553.33 3079.28,-1229.72 3079.28,-813.72 3148,-745 P6.4 ; 19.5,-737.62 19.5,-896.04 93.46,-970 R7.1@134.06,-970
NetIC1_34: IC1.34 P2.3 | length 2085.4
  Top Layer w10: v1(1846,-2875) 1846,-3009 1943.33,-3106.33 1943.33,-3141.33 P2.3 ; v1(2711.72,-1687.07) 2715.55,-1683.24 2715.55,-1673.45 2738.08,-1650.92 2804.35,-1650.92 2817.07,-1638.2 IC1.34
  Bottom Layer w10: v1(1846,-2875) 1846,-2839 2195.63,-2489.37 2263.63,-2489.37 2757,-1996 2757,-1760 2703.83,-1706.83 2707.89,-1702.76 2707.89,-1690.89 v1(2711.72,-1687.07)
NetIC1_35: IC1.35 P2.4 | length 2329.3
  Top Layer w10: v1(1811,-2852) 1811,-2996.63 1892,-3077.63 1892,-3190 P2.4 ; v1(2624.07,-1738.07) 2682.49,-1679.65 2682.49,-1655.51 2737.08,-1600.92 2804.35,-1600.92 2817.07,-1588.2 IC1.35
  Bottom Layer w10: v1(1811,-2852) 1811,-2851.37 2189,-2473.37 2257,-2473.37 2704,-2026.37 2704,-1746 2696.07,-1738.07 v1(2624.07,-1738.07)
NetIC1_36: IC1.36 IC2.8 IC3.13 IC4.4 IC5.36 J3.1 J.3 P6.3 P14.4 P15.3 R1.1 R8.1 U1.2 | length 10622
  Top Layer w12: v2(2167.5,-2760.57) 2168.57,-2759.5 2200.5,-2759.5 2299.18,-2660.82 IC2.8 ; IC3.13 2917.53,-2669 2919.34,-2670.82 2987.18,-2670.82 2989,-2669 ; R8.1@2992.19,-2397.87 2992.19,-2387.28 R8.1
  Top Layer w19: IC5.36 714.13,-2036 719.03,-2040.9 1111.9,-2040.9 v2(1114,-2043) ; P15.3 1673.67,-1522.67 1974,-1823 v1(1974,-1882) ; v2(2738.43,-1527.43) 2739,-1528 2818.68,-1528 IC1.36 ; v2(2926.57,-2413.66) v2@2930.62,-2409.62 ; 2989,-2669 2989,-2468 v2@2930.62,-2409.62 ; R8.1@2992.19,-2397.87 2980.45,-2409.62 v2@2930.62,-2409.62
  Master Layer w19: P15.3 1113,-1920.67 1113,-2042 v2(1114,-2043) 1475,-2043 2167.5,-2735.5 v2(2167.5,-2760.57) ; v2(2738.43,-1527.43) 2820,-1609 2820,-2307.09 v2(2926.57,-2413.66)
  Slave Layer w19: v2(68,-675) 1234.68,-675 1283.71,-724.03 1384.97,-724.03 P14.4
  Bottom Layer w19: v2(68,-675) 68,-677.98 56.1,-689.87 56.1,-713.37 76.99,-734.25 95.69,-734.25 J3.1 100.31,-734.25 119.01,-734.25 144.01,-709.25 144.01,-432.37 132.88,-421.24 100.31,-421.24 J.3 ; P14.4 1475.03,-633.97 1569.86,-633.97 1582,-646.11 1582,-947.98 1455,-1074.98 1455,-1466.67 P15.3 1631.58,-1643.25 1730.25,-1643.25 1763.49,-1676.49 IC4.4 ; U1.2 1926,-1930 v1(1974,-1882) ; v2(2167.5,-2760.57) 2213.07,-2760.57 2220.5,-2768 2304,-2768 2577.62,-2494.38 2845.85,-2494.38 v2(2926.57,-2413.66) ; v2@2738.43,-1530.41 v2(2738.43,-1527.43) ; v2@2739,-1528 3050,-1217 3050,-807 3168,-689 3269.32,-689 3270.35,-690.03 3315.03,-690.03 3343,-718 3343,-791 P6.3
NetIC1_37: IC1.37 P4.3 | length 1818.2
  Top Layer w10: IC1.37@2830.49,-1483.8 2873.39,-1483.8 2882.59,-1493 v1(2888,-1493)
  Master Layer w19: v1(2888,-1493) 2914,-1519 2914,-1894.71 2884,-1924.71 2884,-2292.6 3042,-2450.6 3042,-2766.7 P4.3
NetIC3_12: IC3.12 R4.2 | length 221.8
  Top Layer w10: IC3.12 2887.69,-2688.68 2955,-2756 2955,-2828.59 2983.47,-2857.06 R4.2
NetIC5_3: IC5.3 P9.5 R21.2 S3.1 | length 2836.6
  Top Layer w10: R21.2 R21.2@691.94,-1066.45 ; S3.1 769,-868.34 691.94,-945.39 R21.2@691.94,-1066.45 ; v2(816,-983) 775.4,-983 R21.2@691.94,-1066.45 ; P9.5 925.27,-2535 939.76,-2520.51 940.49,-2520.51 1217,-2244 1264.5,-2244 v1(1268,-2240.5) ; v1(1317,-1987) 1320.83,-1990.83 1320.83,-2016.41 1340.41,-2036 IC5.3
  Slave Layer w10: v2(816,-983) 1211,-983 1321,-1093 1321,-1693.77 1317,-1697.77 v1(1317,-1987)
  Bottom Layer w10: v1(1268,-2240.5) 1271.5,-2240.5 1321,-2191 1321,-2093.71 1317,-2089.71 v1(1317,-1987)
NetIC5_4: IC5.4 P11.1 | length 601.8
  Top Layer w10: IC5.4 1400.69,-1998.72 1418.72,-1998.72 1487,-2067 1487,-2515 P11.1
NetIC5_5: IC5.5 P11.2 | length 690.3
  Top Layer w10: IC5.5 1400.69,-1948.72 1413.72,-1948.72 1505,-2040 1505,-2433 P11.2
NetIC5_6: IC5.6 P11.3 | length 781.6
  Top Layer w10: IC5.6 1399.79,-1886 1421.07,-1907.28 1422.06,-1907.28 1454.47,-1939.7 1454.47,-1958.47 1524,-2028 1524,-2352 P11.3
NetIC5_7: IC5.7 P11.4 | length 873
  Top Layer w10: IC5.7 1399.79,-1836 1420.44,-1856.66 1421.43,-1856.66 1470.47,-1905.7 1470.47,-1951.84 1548,-2029.37 1548,-2276 P11.4
NetIC5_9: IC5.9 LED1.2 | length 2762.2
  Top Layer w10: LED1.2 411.05,-3317.54 425.59,-3303 v1(431,-3303) ; IC5.9 1469.1,-1736 1504.1,-1771 v1(1610,-1771)
  Slave Layer w10: v1(431,-3303) 1076,-3303 1654,-2725 1654,-1815 v1(1610,-1771)
NetIC5_10: IC5.10 P5.4 | length 1950.6
  Top Layer w10: v2(1295,-1683) 1384.98,-1683 IC5.10
  Slave Layer w10: P5.4 239.08,-3031.92 265.89,-3031.92 676,-2621.81 676,-2609 851,-2434 851,-2256 896,-2211 896,-2177 880,-2161 v2(880,-2108)
  Bottom Layer w10: v2(880,-2108) 930.77,-2108 1101.5,-1937.27 1101.5,-1878.5 1295,-1685 v2(1295,-1683)
NetIC5_13: IC5.13 P5.5 | length 2349.8
  Top Layer w10: v2(1295,-1576) 1335,-1536 IC5.13
  Slave Layer w10: P5.5 234.67,-3136.33 234.67,-3101.33 399.6,-2936.4 791.6,-2936.4 971,-2757 971,-2518.69 982,-2507.69 v2(982,-2010)
  Bottom Layer w10: v2(982,-2010) 1030.66,-1961.34 1040.66,-1961.34 1085.5,-1916.5 1085.5,-1785.5 v2(1295,-1576)
NetIC5_14: IC5.14 LED2.2 | length 2069
  Top Layer w10: LED2.2 415.43,-2791.57 v1(472,-2735) ; v1(751,-1651) 1147,-1651 1312,-1486 IC5.14
  Slave Layer w10: v1(472,-2735) 517.56,-2735 644,-2608.56 644,-2595.75 644,-2594.37 694,-2544.37 694,-1708 v1(751,-1651)
NetIC5_16: IC5.16 P5.3 | length 2140.8
  Top Layer w10: v2(1276,-1440) 1330,-1386 IC5.16
  Slave Layer w10: P5.3 335.18,-2940 660,-2615.18 660,-2602.37 660,-2601 831,-2430 831,-2055 850.64,-2035.36 850.64,-2013.83 v2(854.46,-2010)
  Bottom Layer w10: v2(854.46,-2010) 854.91,-2009.56 876.44,-2009.56 953,-1933 953,-1850.71 1276,-1527.71 v2(1276,-1440)
NetIC5_23: IC5.23 P5.2 | length 1761.7
  Top Layer w10: P5.2 415.34,-2655.66 596.9,-2655.66 644,-2608.56 644,-1428.2 664.92,-1407.28 665.91,-1407.28 687.19,-1386 IC5.23
NetIC5_25: IC5.25 P9.6 | length 1171.2
  Top Layer w10: IC5.25 740,-1486 v1(756,-1502)
  Bottom Layer w10: v1(756,-1502) 694,-1564 694,-2336.77 812,-2454.77 P9.6
NetIC5_29: IC5.29 IC6.1 | length 1582
  Top Layer w10: IC5.29 711.72,-1698.72 774.3,-1698.72 782.59,-1707 v1(783.5,-1707) ; v1(1168,-2894) 1168.5,-2894.5 1284.23,-2894.5 IC6.1
  Slave Layer w10: v1(783.5,-1707) 826.77,-1707 1069,-1949.23 1069,-2789.59 1168,-2888.59 v1(1168,-2894)
NetIC5_30: IC5.30 IC6.6 | length 1321.9
  Top Layer w10: IC5.30 747.59,-1736 764.59,-1753 v1(770,-1753) ; v1(895,-2785) 900.41,-2785 910.41,-2795 IC6.6
  Slave Layer w10: v1(770,-1753) 770,-1754 955,-1939 955,-2720.59 895,-2780.59 v1(895,-2785)
NetIC5_31: IC5.31 IC6.2 | length 1568.3
  Top Layer w10: IC5.31 833.36,-1786 849.47,-1802.12 v1(854.88,-1802.12) ; v1(1090,-2895) 1092.79,-2892.21 1109.63,-2892.21 1156.84,-2845 IC6.2
  Slave Layer w10: v1(854.88,-1802.12) 854.88,-1807.53 862.83,-1815.47 862.83,-1816.6 1052.53,-2006.3 1052.53,-2857.53 v1(1090,-2895)
NetIC5_34: IC5.34 P9.3 | length 1238.3
  Top Layer w10: IC5.34 753,-1936 v1(779,-1962) ; v1(805,-2348) 723.82,-2429.18 723.82,-2631.96 729.67,-2637.82 1009.18,-2637.82 P9.3
  Slave Layer w10: v1(779,-1962) 805,-1988 v1(805,-2348)
NetIC5_35: IC5.35 P9.4 | length 1038.2
  Top Layer w10: IC5.35 711.72,-1998.72 773.72,-1998.72 v1(777,-2002) ; v1(791.88,-2397.88) 791.88,-2399.49 740,-2451.37 740,-2614.14 745.86,-2620 927,-2620 P9.4
  Slave Layer w10: v1(777,-2002) 777,-2179.21 772,-2184.21 772,-2356 781.17,-2365.17 781.17,-2387.17 v1(791.88,-2397.88)
NetIC5_37: IC5.37 IC6.5 | length 972.7
  Top Layer w10: IC5.37 711.72,-2098.72 724.52,-2098.72 794,-2168.2 794,-2305.83 707.82,-2392.01 707.82,-2638.59 814.23,-2745 IC6.5
NetJ1_2: J1.2 P17.1 | length 3541.1
  Bottom Layer w25: P17.1 1104,-3311.84 1422.81,-2993.03 2213.75,-2993.03 2609.11,-2597.67 2826.19,-2597.67 2974.5,-2449.37 2974.5,-2113.66 2941.5,-2080.66 2941.5,-1592.34 2952.34,-1581.5 3126.37,-1581.5 3227,-1480.87 J1.2
NetLED1_1: LED1.1 R5.1 | length 67.3
  Top Layer w10: LED1.1 400.69,-3384.46 409.47,-3375.68 R5.1
NetLED2_1: LED2.1 R17.1 | length 234.5
  Top Layer w10: LED2.1 556.06,-2862.43 579.06,-2885.43 R17.1
NetLED3_1: LED3.1 R18.1 | length 228.3
  Top Layer w10: LED3.1 366,-3149 R18.1
NetR2_2: R2.2 U1.3 | length 165.8
  Bottom Layer w10: U1.3 1888,-1980 1944.28,-2036.28 1944.28,-2078.17 1953.06,-2086.94 R2.2
VCC: C1.2 C2.2 C6.2 C7.2 C8.2 C9.2 C10.2 IC1.2 IC2.1 IC2.2 IC3.5 IC3.8 IC4.2 IC4.6 IC4.8 IC5.2 IC6.3 IC6.7 IC6.8 J2.2 J3.3 J.1 P1.1 P2.1 P4.2 P5.7 P6.1 P7.7 P9.1 P14.1 P15.1 P17.6 R1.2 R2.1 R4.1 R7.2 R8.2 R9.1 R10.2 R19.1 R21.1 S2.1 S4.1 U1.8 | length 18806.5
  Top Layer w15: v1(2417,-2703) 2433.15,-2686.85 2433.15,-2665.13 2432.31,-2664.28 IC2.1 ; C8.2 2759.7,-2712.92 ; C10.2 2779.85,-2878.19 2759.7,-2858.04 2759.7,-2712.92 ; IC3.5@2804,-2648 2793.71,-2648 2783.22,-2658.49 2783.22,-2699.2 2796.94,-2712.92 ; IC3.8 2810.62,-2712.92 2796.94,-2712.92 ; 2759.7,-2712.92 2796.94,-2712.92
  Top Layer w19: v2(26,-1066) 26,-300.98 42,-284.98 v2(42,-282) ; P5.7 325,-3434 546,-3434 P17.6 604,-3266 666.51,-3203.49 833.51,-3203.49 1002,-3035 v2(1002,-3030) 1002,-2895.73 IC6.8 IC6.7 1121.9,-2845 1171.9,-2795 IC6.3 1407.19,-2795 1463.19,-2851 C7.2 1482,-2858 v2(1573,-2858) ; S2.1 514.03,-554.51 879.97,-554.51 S4.1 ; R21.1 752.31,-1071.69 955.64,-1071.69 R19.1@957.94,-1069.39 ; 875.97,-558.51 875.97,-943.65 957.94,-1025.62 R19.1@957.94,-1069.39 ; R19.1 R19.1@957.94,-1069.39 ; v2(1252,-1943) 1252,-2037 1288.28,-2073.28 1375.26,-2073.28 IC5.2 1439.87,-2086 1451,-2097.13 1451,-2440.53 1356.53,-2535 P9.1 ; P15.1 1531.55,-1343.22 1976.16,-1343.22 1990.94,-1358 v2(1995,-1358) 1995.96,-1358.96 1995.96,-1406.1 2078.06,-1488.2 IC1.2 ; P14.1 1752.03,-656.97 1808.03,-656.97 1893,-572 1893,-496.27 1928.6,-460.66 1952.34,-460.66 P7.7 ; P2.1 1990,-2945 P1.1 ; C1.2 2166.72,-2626.15 2127,-2665.87 P1.1 ; IC2.2@2422.46,-2611.61 IC2.2 ; IC2.1 IC2.2 ; C8.2 2636.31,-2531 2555.7,-2611.61 IC2.2 ; C10.2 2779.85,-2901.81 2842.04,-2964 2943.46,-2964 3042.53,-2864.94 R4.1 3049,-2854.53 3049,-2389.53 R8.2 3055.76,-2382.76 3055.76,-2316.24 R10.2 3056,-2312.06 3064.78,-2303.28 3068.72,-2303.28 3091.11,-2280.89 J2.2 3157.11,-2156 2923.13,-2156 2912,-2144.87 2912,-1564.91 2923.13,-1553.78 3184.22,-1553.78 3289,-1449 P6.1 ; P4.2 3117.7,-3349 2470,-3349 2127,-3006 P1.1
  Bottom Layer w19: v2(26,-1066) 97.12,-1066 134.06,-1029.06 R7.2 ; v2(42,-282) 44.1,-284.1 44.1,-304.99 79.3,-340.19 J.1 299.71,-340.19 S2.1 ; J3.3 95.69,-817.62 58.13,-817.62 47,-828.75 47,-867.92 90.44,-911.35 132.77,-911.35 171.22,-949.8 171.22,-999.78 R7.2@141.46,-1029.53 ; C6.2 974,-3063 1002,-3035 v2(1002,-3030) ; S4.1 1161.32,-509.48 1258.34,-606.5 1657.5,-606.5 P14.1 ; v2(1252,-1943) 1254.1,-1945.1 1261.88,-1945.1 1265.22,-1948.44 1402.68,-1948.44 1566.21,-2111.98 1699.55,-2111.98 1711.7,-2124.13 C2.2 ; P9.1 1312,-2701 1469,-2858 v2(1573,-2858) 1660,-2945 P2.1 ; U1.8 1667.5,-1881.5 1698.27,-1881.5 1728.72,-1911.94 1728.72,-2052.86 1728.22,-2053.36 1728.22,-2099.91 1723.85,-2104.27 1723.85,-2122.85 C2.2 ; R9.1 IC4.2 1812.06,-1613.5 1843.55,-1644.99 ; U1.8@1696.77,-1880 1707.66,-1880 1811.97,-1775.69 1848.96,-1775.69 ; IC4.6 1843.55,-1644.99 ; C9.2 1884.7,-1496.56 1884.7,-1573.78 IC4.8 1913.14,-1582 1952.72,-1621.58 1952.72,-1671.94 1848.96,-1775.69 ; C9.2@1880,-1490 1880,-1476.34 1890.3,-1466.04 1903.96,-1466.04 1992.9,-1377.1 1992.9,-1360.1 v2(1995,-1358) 1995,-1355.23 1884.22,-1244.44 1884.22,-542.44 1944.8,-481.86 1944.8,-479.04 1960,-463.84 P7.7 ; R2.1 1953.06,-2146 1948.78,-2150.28 1948.78,-2167.88 1911.22,-2205.44 1773.11,-2205.44 1726.63,-2158.96 1723.85,-2158.96 1711.7,-2146.81 C2.2 ; P1.1 2312,-2808 v1(2417,-2703) ; R1.2 3109.6,-845.54 3109.6,-878.26 3121.37,-890.03 3315.03,-890.03 3340,-915 3340,-994 P6.1 ; 1843.55,-1644.99 1843.55,-1770.28 1848.96,-1775.69
pads on no net: IC1.4 IC1.5 IC1.6 IC1.7 IC1.17 IC1.18 IC1.19 IC1.20 IC1.21 IC1.22 IC1.24 IC1.27 IC1.28 IC1.32 IC2.6 IC3.4 IC3.9 IC3.10 IC3.11 IC5.8 IC5.11 IC5.12 IC5.17 IC5.18 IC5.19 IC5.20 IC5.21 IC5.22 IC5.24 IC5.26 IC5.27 IC5.28 IC5.32 J1.MH1 J1.MH2 J2.MH1 J2.MH2 J3.S1 J3.S2 J.S1 J.S2 P3.5 P3.6 P4.6 P5.1 P5.8 P6.5 P6.6 P6.7 P6.8 P6.9 P7.1 P7.2 P8.2 P8.3 P8.4 P8.5 P8.6 P8.7 P8.8 P14.5 P15.5 P15.6 P15.7 P17.3 P17.4 S1.3 S1.4 S2.3 S2.4 S3.3 S3.4 S4.3 S4.4

## Polygon pours and split planes (outlines as drawn)
GND on Bottom Layer "GND_L04_P000" (solid, pour order 0): 4,-5 3549,-5 3549,-3672 4,-3672

## Keep-outs
Keep-Out Layer:
  rectangle: 121,-2604 633,-1076
  rectangle: 1360,-591 1834,-118
  rectangle: 2960,-2073 3433,-1600
  rectangle: 1360,-3555 1833,-3082
  lines w10: -1,-3677 -1,0 3554,0 3554,-3677 2455.5,-3677 2086.75,-3677 1902.38,-3677 1810.19,-3676 1625.81,-3676 1533.63,-3677 1349.25,-3677 980.5,-3677 -1,-3677

## Silkscreen, mask and mechanical layers (free items; w line width, h text height)
Top Overlay:
  lines w10: 1900,-2399 2929,-2399 2929,-149 1900,-149 1900,-2399 ; 2575,-3349.82 2575,-2445.82 3375,-2445.82 3375,-3349.82 2575,-3349.82
  text "GPS" at 2307.03,-536 h60
  text "GND" at 3074,-1294 h25
  text "5V" at 3206,-1295 h25
  text "Master" at 2310,-1380 h60
  text "Slave" at 899,-1404 h60
  text "VCC" at 3145,-2317 h25 r90
  text "GND" at 3148,-2433 h25 r90
  text "MIO0" at 765,-2470 h25
  text "MEN" at 880,-2470 h25
  text "MTX" at 979,-2470 h25
  text "MRX" at 1076,-2470 h25
  text "VCC" at 1280,-2470 h25
  text "GND" at 1178,-2471 h25
  text "VCC" at 2089,-2730 h25
  text "GND" at 1984,-2731 h25
  text "VCC" at 2042,-2977 h25 r90
  text "GND" at 2042,-3078 h25 r90
  text "RADIO" at 2854,-3133 h60
  text "SRX" at 2043,-3177 h25 r90
  text "STX" at 2045,-3276 h25 r90
  text "SEN" at 2045,-3377 h25 r90
  text "Model Tsukuyomi 05/22" at 2154,-3480.01 h60
  text "SIO0" at 2045,-3489 h25 r90
Bottom Overlay:
  lines w10: 1457,-2645.67 2362.51,-2645.67 2362.51,-1267.72 1457,-1267.72 1457,-2645.67
Mechanical 1:
  the board outline again, w0

## Text inside footprints (layer, text, board x,y; h text height)
U1: Bottom Overlay "*" at 1882.5,-1863 h50; Mechanical 13 "*" at 1882.5,-1863 h50